# EAGLE board MAAV_Vehicle_13v1 (EAGLE 6.2)
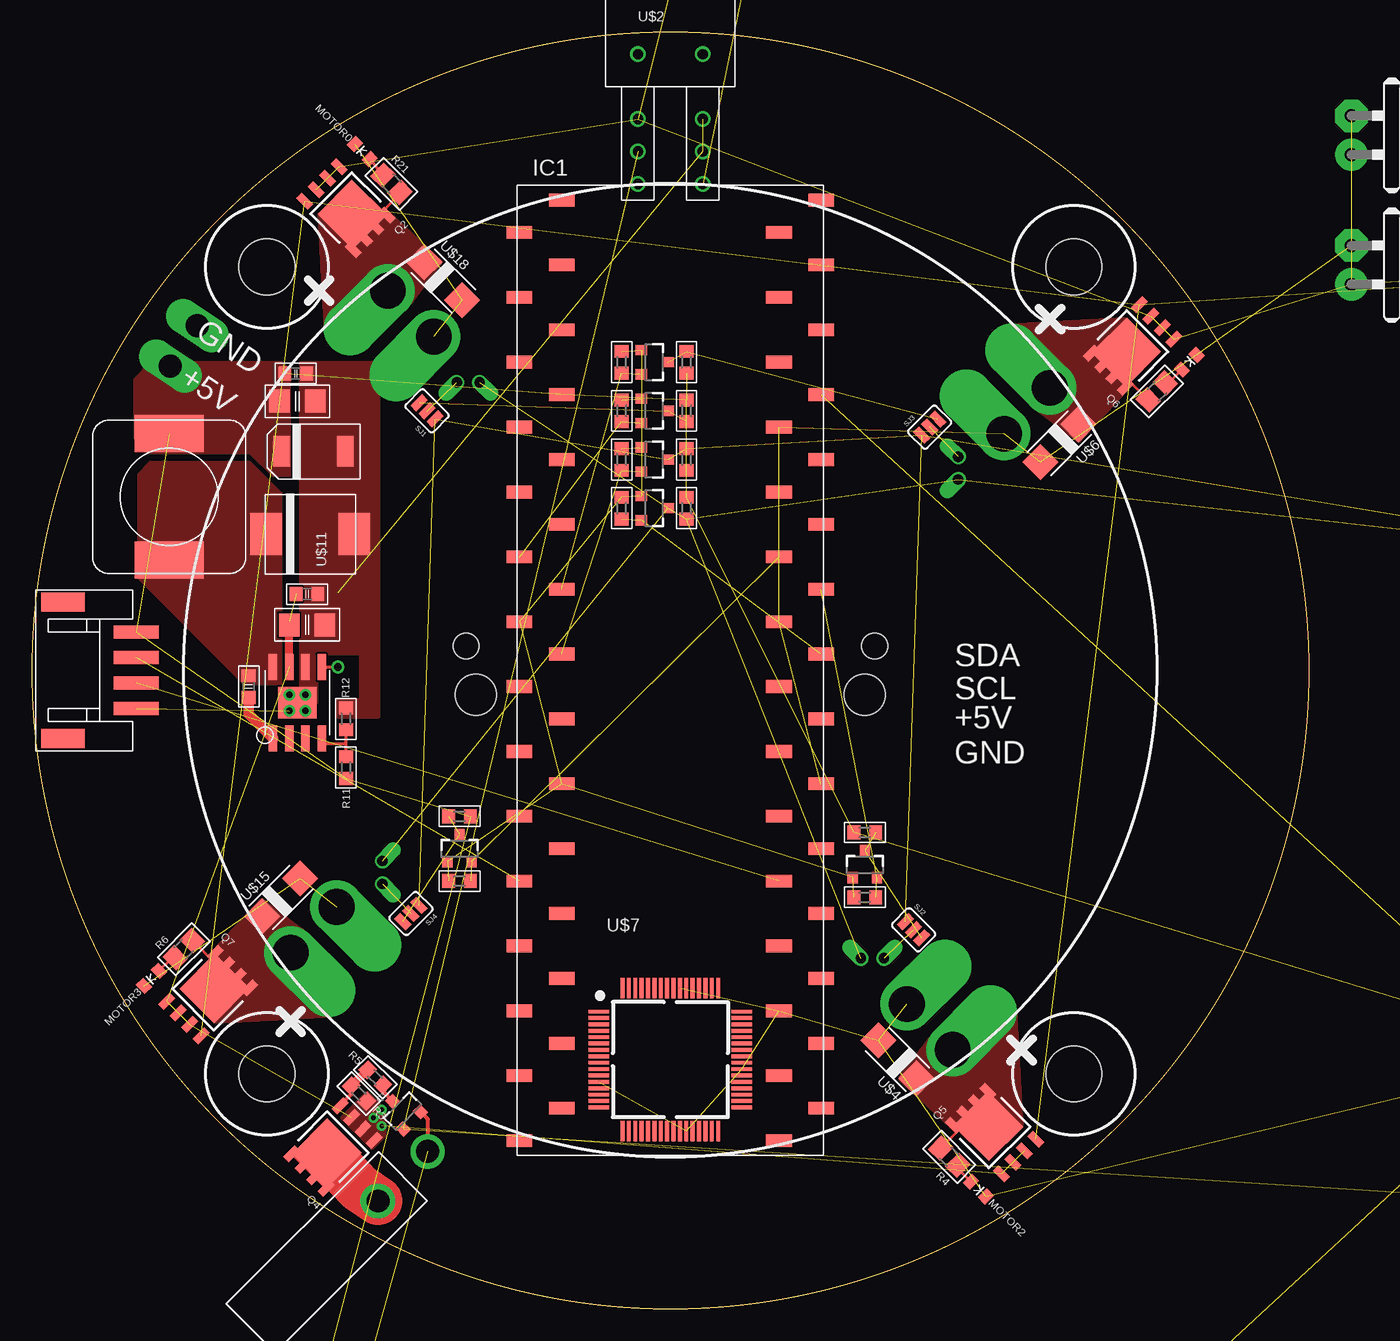
[diagram p0: board, top side]
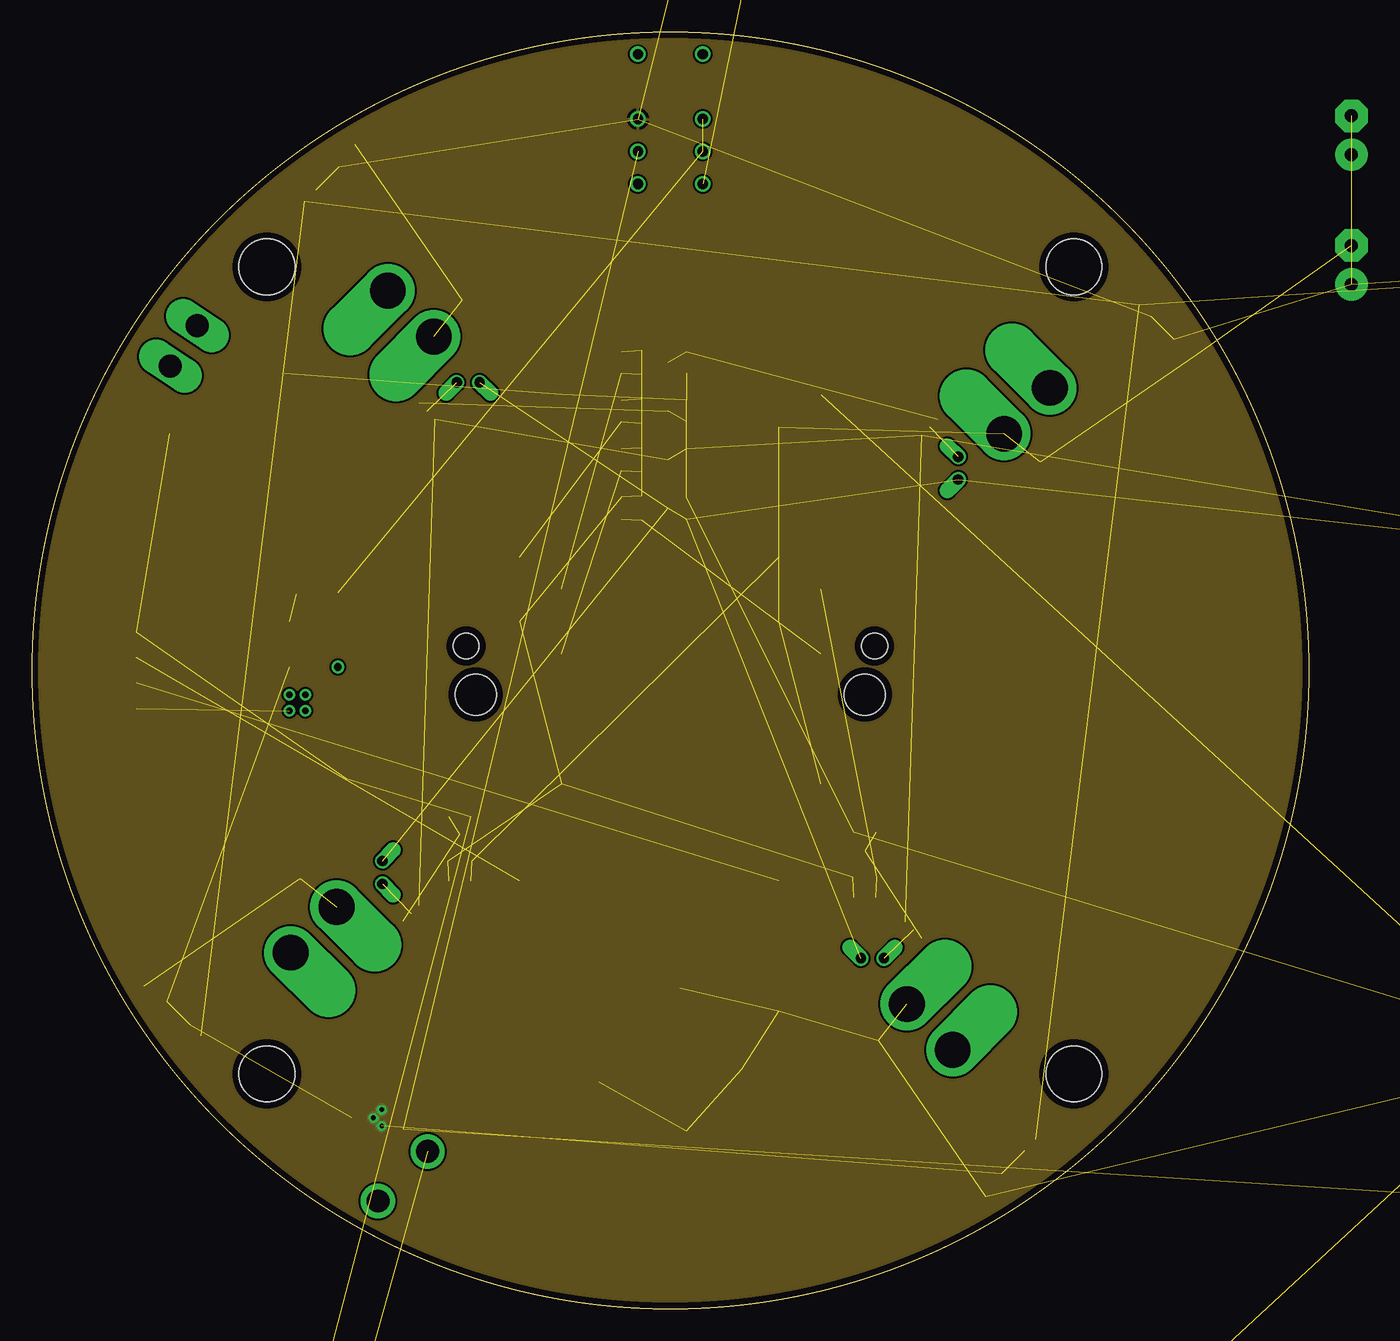
[diagram p1: board, inner layer Route2]
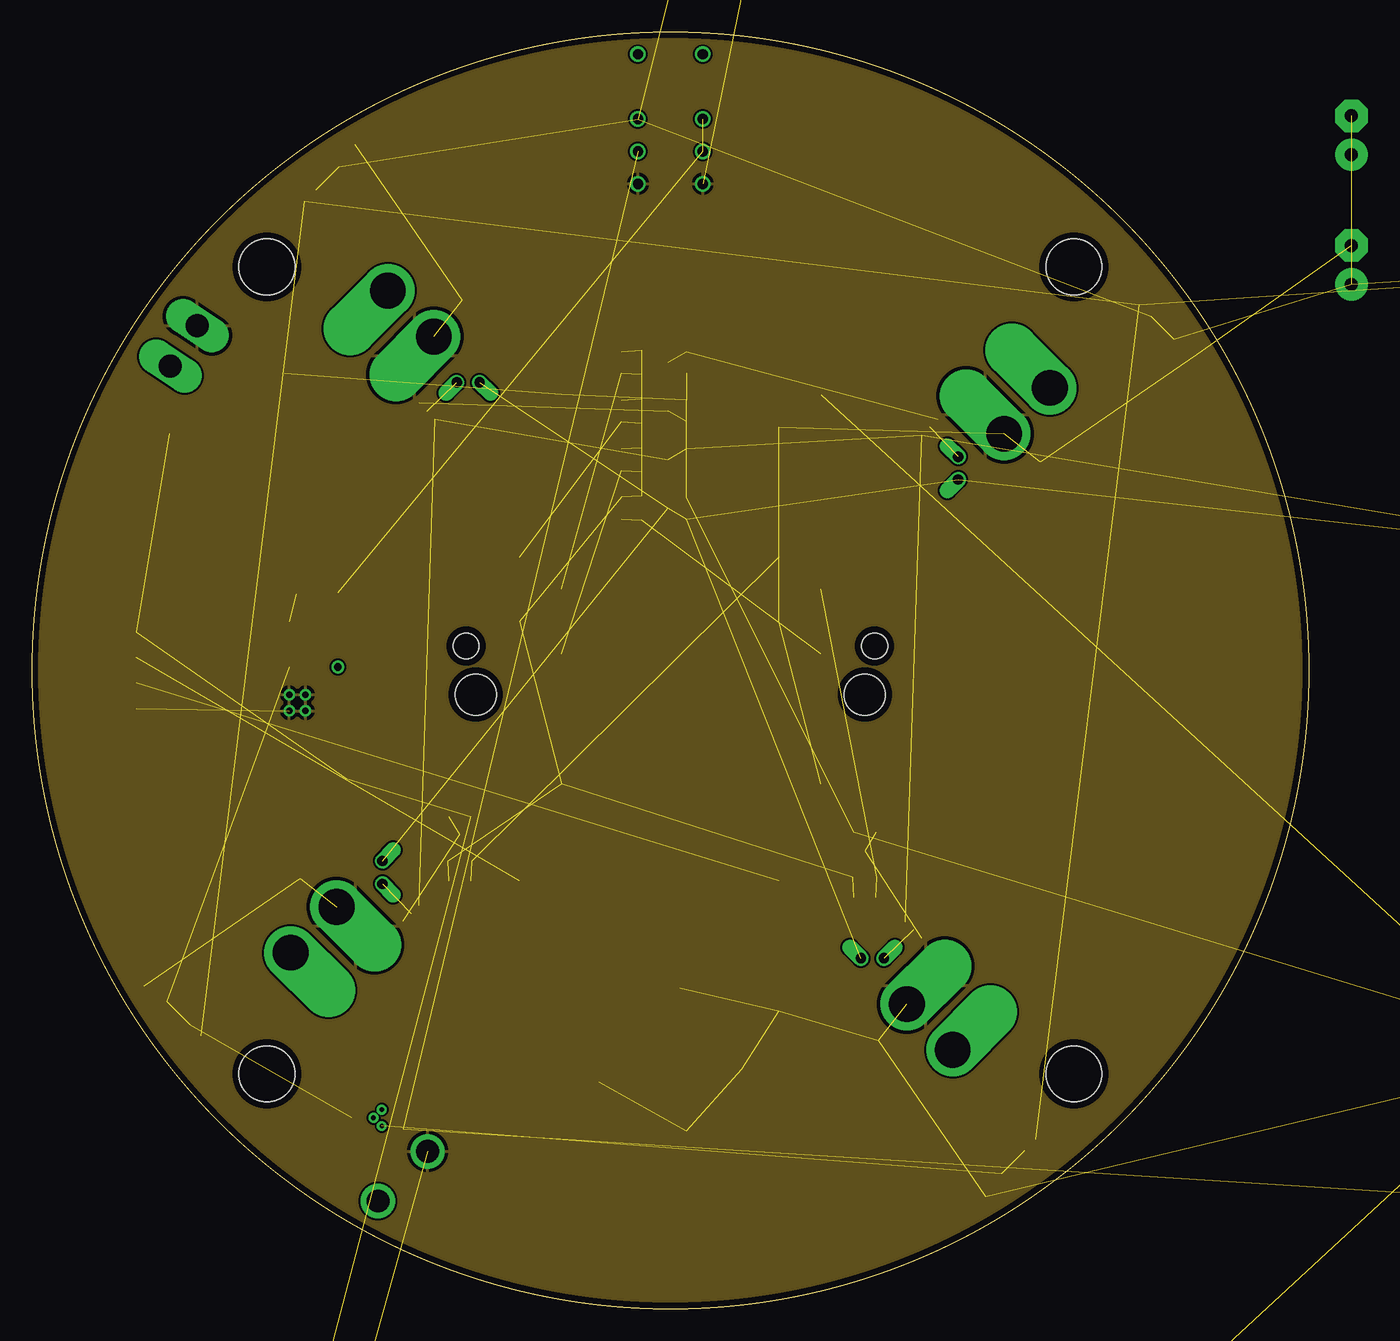
[diagram p2: board, inner layer Route15]
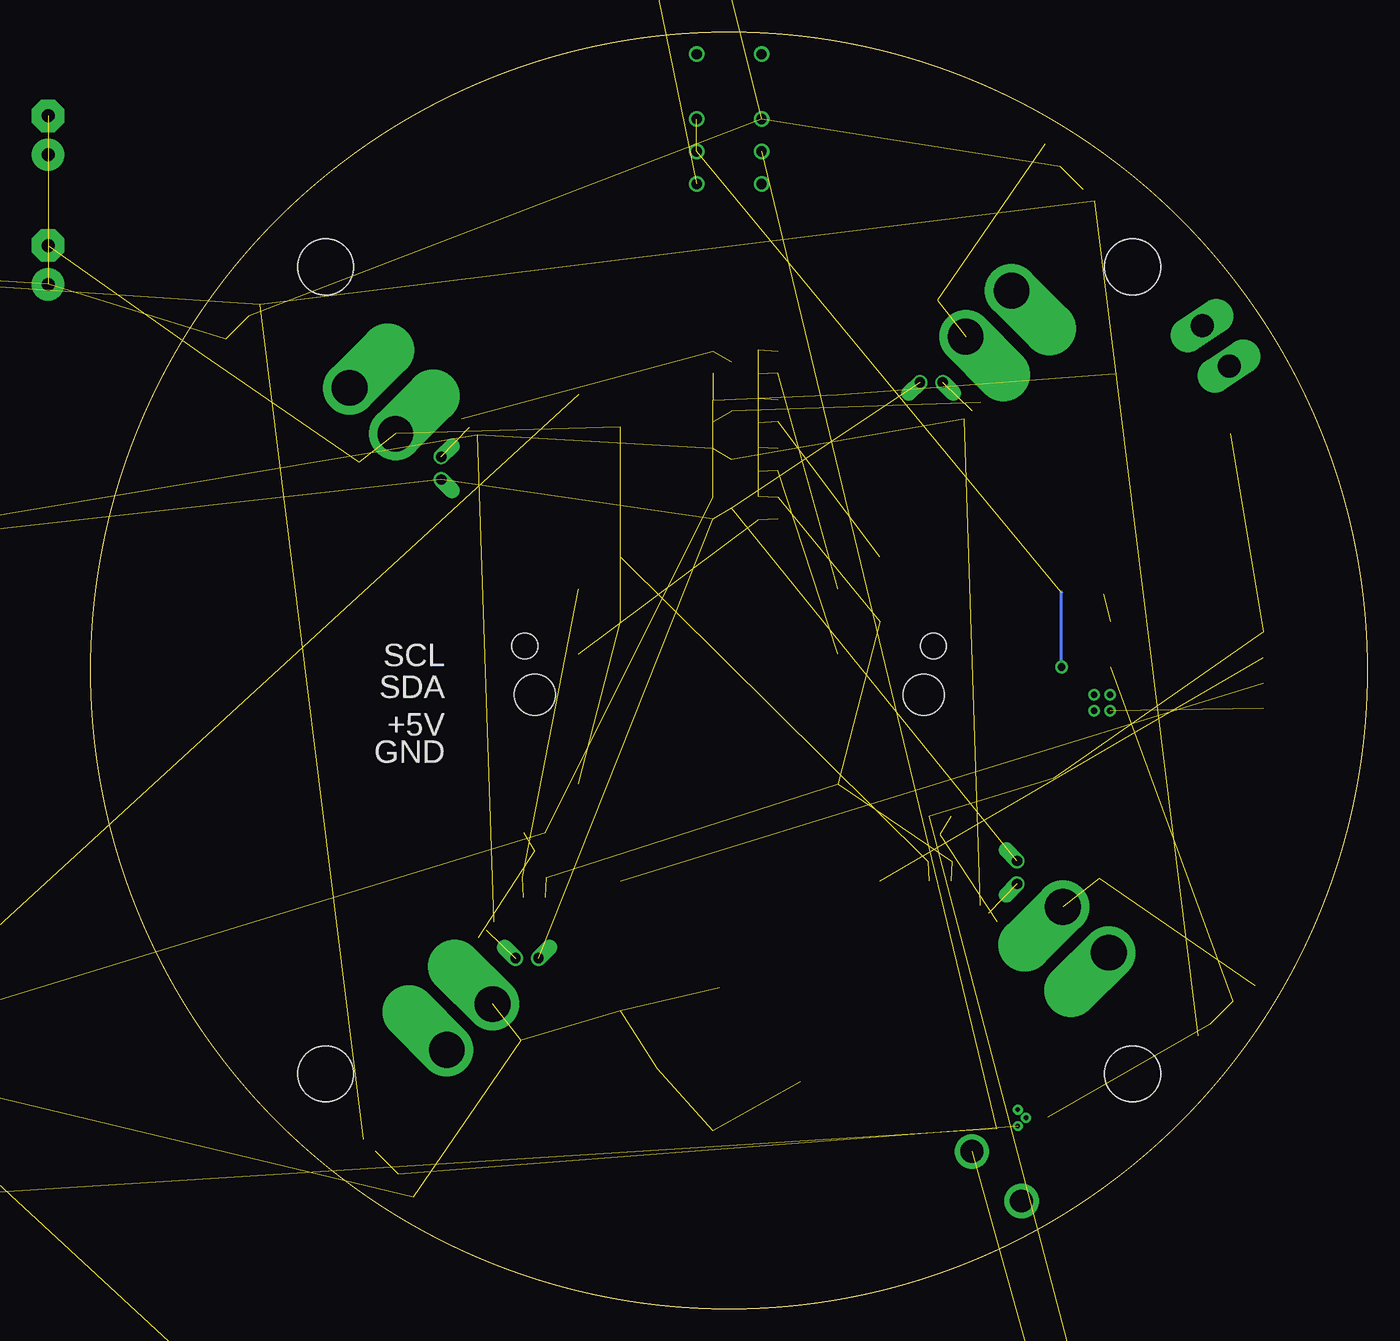
[diagram p3: board, bottom side, seen from below]

Size 100 x 100 mm. Coordinates in mm from the lower left corner, seen from the top.
Outline: circle at 50,50 radius 50
Copper layers (1+2*15+16): Top 0.0178mm / dielectric 12mil / Route2 0.0356mm / dielectric 28mil / Route15 0.0356mm / dielectric 12mil / Bottom 0.0178mm
Design rules: minimum track width 6mil, minimum drill 8mil, track to track 6mil, track to pad 6mil, pad to pad 6mil, via to via 6mil, smd to smd 6mil, copper to edge 20mil, drill to drill 16mil, minimum pad ring 8mil, minimum via ring 8mil, stop-mask expansion 3mil, vias tented up to drill 0mil, thermal gap 10mil
Holes 4.37 mm at 81.6,81.6 81.6,18.4 18.4,18.4 18.4,81.6

## Footprints (pad centres in the part's own frame; a part is rotated, then mirrored left to right if it is on the bottom)
C_2917_POL = smd 1.3 x 2.4: A -2.5,0; C 2.5,0
C0603 = smd 1 x 1.1: 1 -0.85,0; 2 0.85,0
C1206 = smd 1.6 x 1.8: 1 -1.4,0; 2 1.4,0
0805 = smd 0.8 x 1.2: 1 -0.9,0; 2 0.9,0
0603-CAP = smd 1.1 x 1: 1 -0.85,0; 2 0.85,0
EH22-9 = drill 1.016 pad 2.54: + 0,-1.524 | drill 1.016 pad 2.54 octagon: - 0,1.524
PINTO_SMD = smd 2 x 1: P1 8.509,-36.83; P2 -11.811,-36.83; P3 11.811,-34.29; P4 -8.509,-34.29; P5 8.509,-31.75; P6 -11.811,-31.75; P7 11.811,-29.21; P8 -8.509,-29.21; P9 8.509,-26.67; P10 -11.811,-26.67; P11 11.811,-24.13; P12 -8.509,-24.13; P13 8.509,-21.59; P14 -11.811,-21.59; P15 11.811,-19.05; P16 -8.509,-19.05; P17 8.509,-16.51; P18 -11.811,-16.51; P19 11.811,-13.97; P20 -8.509,-13.97; P21 8.509,-11.43; P22 -11.811,-11.43; P23 11.811,-8.89; P24 -8.509,-8.89; P25 8.509,-6.35; P26 -11.811,-6.35; P27 11.811,-3.81; P28 -8.509,-3.81; P29 8.509,-1.27; P30 -11.811,-1.27; P31 11.811,1.27; P32 -8.509,1.27; P33 8.509,3.81; P34 -11.811,3.81; P35 11.811,6.35; P36 -8.509,6.35; P37 8.509,8.89; P38 -11.811,8.89; P39 11.811,11.43; P40 -8.509,11.43; P41 8.509,13.97; P42 -11.811,13.97; P43 11.811,16.51; P44 -8.509,16.51; P45 8.509,19.05; P46 -11.811,19.05; P47 11.811,21.59; P48 -8.509,21.59; P49 8.509,24.13; P50 -11.811,24.13; P51 11.811,26.67; P52 -8.509,26.67; P53 8.509,29.21; P54 -11.811,29.21; P55 11.811,31.75; P56 -8.509,31.75; P57 8.509,34.29; P58 -11.811,34.29; P59 11.811,36.83; P60 -8.509,36.83
IMU = hole 3.226: -15.24,-1.905; 15.24,-1.905 | hole 2.032: -16.002,1.905; 16.002,1.905
MA03-2 = drill 1.016 octagon: P$1 -2.54,-1.46; P$2 0,-1.079; P$3 2.54,-1.46; P$4 2.54,1.079; P$5 0,1.46; P$6 -2.54,1.079
MA-04-SMD = smd 3.5 x 1: 1 2.875,3; 2 2.875,1; 3 2.875,-1; 4 2.875,-3 | smd 3.4 x 1.5: P$1 -2.875,-5.35; P$2 -2.875,5.35
POWER_CONN = drill 1.8: P1 2.75,0; P2 -2.75,0
LED-0603 = smd 0.8 x 0.8: A 0,-0.75; C 0,0.75
CHIPLED_0603 = smd 0.8 x 1: A -0.825,0; C 0.825,0
SOT-23 = smd 0.787 x 0.889: 1 0.025,-1.016; 2 -0.94,1.016; 3 0.991,1.016
CRYSTAL_16MHZ = drill 0.8: P$1 -2.44,0; P$2 2.44,0
SO-8_POWER-PAK = smd 0.61 x 1.27: D1 -1.905,2.67; D2 -0.635,2.67; D3 0.635,2.67; D4 1.905,2.67; G 1.905,-2.67; S1 -1.905,-2.67; S2 -0.635,-2.67; S3 0.635,-2.67 | smd 3.81 x 3.91: D5 0,0.69
SOT23-3 = smd 0.8 x 0.9: 1 -0.95,-1; 2 0.95,-1; 3 0,1.1
R0603 = smd 1 x 1.1: 1 -0.85,0; 2 0.85,0
R0805 = smd 1.3 x 1.5: 1 -0.95,0; 2 0.95,0
0603-RES = smd 1.1 x 1: 1 -0.85,0; 2 0.85,0
SWITCH-OFF-MOM = smd 1.45 x 1: P$1 2.575,0.85; P$2 2.575,-0.85; P$3 -2.575,0.85; P$4 -2.575,-0.85
SJ_3 = smd 0.635 x 1.27: 1 -0.889,0; 2 0,0; 3 0.889,0
MA04-1 = drill 1.016 long: 1 -3.81,0; 2 -1.27,0; 3 1.27,0; 4 3.81,0
TPS5450 = smd 2.032 x 0.66: P$1 -2.794,1.905; P$2 -2.794,0.635; P$3 -2.794,-0.635; P$4 -2.794,-1.905; P$5 2.794,-1.905; P$6 2.794,-0.635; P$7 2.794,0.635; P$8 2.794,1.905 | smd 2.49 x 2.99: P$9 0,0 | drill 0.5: P$10 0.635,0.635; P$11 0.635,-0.635; P$12 -0.635,-0.635; P$13 -0.635,0.635
32-TQFP = smd 1.6 x 0.45: P$1 -4.1,2.8; P$2 -4.1,2; P$3 -4.1,1.2; P$4 -4.1,0.4; P$5 -4.1,-0.4; P$6 -4.1,-1.2; P$7 -4.1,-2; P$8 -4.1,-2.8; P$17 4.1,-2.8; P$18 4.1,-2; P$19 4.1,-1.2; P$20 4.1,-0.4; P$21 4.1,0.4; P$22 4.1,1.2; P$23 4.1,2; P$24 4.1,2.8 | smd 0.45 x 1.6: P$9 -2.8,-4.1; P$10 -2,-4.1; P$11 -1.2,-4.1; P$12 -0.4,-4.1; P$13 0.4,-4.1; P$14 1.2,-4.1; P$15 2,-4.1; P$16 2.8,-4.1; P$25 2.8,4.1; P$26 2,4.1; P$27 1.2,4.1; P$28 0.4,4.1; P$29 -0.4,4.1; P$30 -1.2,4.1; P$31 -2,4.1; P$32 -2.8,4.1
8-SOIC = smd 2 x 0.6: P$1 -2.4,1.905; P$2 -2.4,0.635; P$3 -2.4,-0.635; P$4 -2.4,-1.905; P$5 2.4,-1.905; P$6 2.4,-0.635; P$7 2.4,0.635; P$8 2.4,1.905
CDRH127 = smd 2.9 x 5.4: P1 -4.95,0; P2 4.95,0
SWITCH_VERT_DPDT = drill 0.8: G1 -2.54,2.54; G2 -2.54,-2.54; P$1 7.62,-2.54; P$2 5.08,-2.54; P$3 2.54,-2.54; P$4 7.62,2.54; P$5 5.08,2.54; P$6 2.54,2.54
ESC_CONN = drill 2.8 offset: BATT 2.54,0; GND -2.54,0 | drill 0.8 offset: SCL/C- -7.62,0; SDA/C+ -6.35,1.27
DO-214AC,SMC = smd 2 x 2: A 2.1,0; C -2.1,0
64-PQFP = smd 1.6 x 0.3: P$1 -5.6,3.75; P$2 -5.6,3.25; P$3 -5.6,2.75; P$4 -5.6,2.25; P$5 -5.6,1.75; P$6 -5.6,1.25; P$7 -5.6,0.75; P$8 -5.6,0.25; P$9 -5.6,-0.25; P$10 -5.6,-0.75; P$11 -5.6,-1.25; P$12 -5.6,-1.75; P$13 -5.6,-2.25; P$14 -5.6,-2.75; P$15 -5.6,-3.25; P$16 -5.6,-3.75; P$33 5.6,-3.75; P$34 5.6,-3.25; P$35 5.6,-2.75; P$36 5.6,-2.25; P$37 5.6,-1.75; P$38 5.6,-1.25; P$39 5.6,-0.75; P$40 5.6,-0.25; P$41 5.6,0.25; P$42 5.6,0.75; P$43 5.6,1.25; P$44 5.6,1.75; P$45 5.6,2.25; P$46 5.6,2.75; P$47 5.6,3.25; P$48 5.6,3.75 | smd 0.3 x 1.6: P$17 -3.75,-5.6; P$18 -3.25,-5.6; P$19 -2.75,-5.6; P$20 -2.25,-5.6; P$21 -1.75,-5.6; P$22 -1.25,-5.6; P$23 -0.75,-5.6; P$24 -0.25,-5.6; P$25 0.25,-5.6; P$26 0.75,-5.6; P$27 1.25,-5.6; P$28 1.75,-5.6; P$29 2.25,-5.6; P$30 2.75,-5.6; P$31 3.25,-5.6; P$32 3.75,-5.6; P$49 3.75,5.6; P$50 3.25,5.6; P$51 2.75,5.6; P$52 2.25,5.6; P$53 1.75,5.6; P$54 1.25,5.6; P$55 0.75,5.6; P$56 0.25,5.6; P$57 -0.25,5.6; P$58 -0.75,5.6; P$59 -1.25,5.6; P$60 -1.75,5.6; P$61 -2.25,5.6; P$62 -2.75,5.6; P$63 -3.25,5.6; P$64 -3.75,5.6
LIPO_POWER = drill 2.8 octagon: GND 3.81,0 | drill 2.8: V_BATT -3.81,0
LIPO_POWER_50A = drill 2.8: BATT -3.81,0 | drill 2.8 octagon: GND 3.81,0
H3894-ND = drill 0.8: GND 0,-2.75; POW -2,-2.75; SIG 2,-2.75
DO-214AB,SMC = smd 2.5 x 3.3: A 3.45,0; C -3.45,0
POWER_HOLES = drill 1.8 long: P$1 -1.905,0; P$2 1.905,0

## Placement (x,y rotation side)
C2  [C_2917_POL]  22.06,67.14 0 top
C3  0.01uF  [C0603]  21.55,55.97 0 top
C4  10uF  [C1206]  185.89,-2.07 0 top  (outside the outline)
C5  10uF  [C1206]  21.55,53.56 0 top
C6  0.01uF  [C0603]  16.98,48.73 90 top
C7  10uF  [C1206]  20.79,71.08 0 top
C8  10uF  [0805]  289.39,-69.3 90 top  (outside the outline)
C9  10uF  [0603-CAP]  281.77,-71.28 90 top  (outside the outline)
C10  100nF  [0603-CAP]  176.54,81.75 90 top  (outside the outline)
C11  100nF  [0603-CAP]  189.7,80.48 36.2 top  (outside the outline)
C12  100nF  [0603-CAP]  171.92,72.86 270 top  (outside the outline)
C13  100nF  [0603-CAP]  174.46,81.75 90 top  (outside the outline)
C14  22pF  [0603-CAP]  192.24,68.41 90 top  (outside the outline)
C15  22pF  [0603-CAP]  192.24,65.24 270 top  (outside the outline)
C16  0.01uF  [C0603]  20.66,73.24 0 top
C17  0.1uF  [C0603]  123.66,23.33 0 top  (outside the outline)
C18  10uF  [C1206]  121.12,19.52 0 top  (outside the outline)
C25  10uF  [C1206]  62.7,138.9 270 top  (outside the outline)
C28  680uF  [EH22-9]  103.34,91.91 0 top  (outside the outline)
C29  680uF  [EH22-9]  103.34,81.75 0 top  (outside the outline)
IC1  PINTO_SMD  [PINTO_SMD]  50,50 0 top
IMU_LAYOUT  IMU  [IMU]  50,50 0 bottom
J1  MA03-2  [MA03-2]  190.97,75.4 300 top  (outside the outline)
J7  MA04-1  [MA-04-SMD]  5.3,50 0 top
LASER_POWER  POWER_CONN  [POWER_CONN]  29.05,10.38 225 top
LED1  GREEN  [LED-0603]  176.6,92.92 330 top  (outside the outline)
LED2  GREEN  [LED-0603]  174.84,93.94 330 top  (outside the outline)
LED3  GREEN  [LED-0603]  173.08,94.96 330 top  (outside the outline)
MOTOR0  GREEN  [CHIPLED_0603]  25.87,90.64 135 top
MOTOR1  GREEN  [CHIPLED_0603]  90.64,74.13 45 top
MOTOR2  GREEN  [CHIPLED_0603]  74.13,9.36 315 top
MOTOR3  GREEN  [CHIPLED_0603]  9.36,25.87 225 top
MR1  [SOT-23]  171.92,81.75 180 top  (outside the outline)
Q1  CRYSTAL_16MHZ  [CRYSTAL_16MHZ]  188.43,66.51 90 top  (outside the outline)
Q2  [SO-8_POWER-PAK]  24.6,86.19 225 top
Q3  MOSFET-NCHANNELSMD  [SOT23-3]  29.05,15.46 45 top
Q4  [SO-8_POWER-PAK]  23.58,12.66 135 top
Q5  [SO-8_POWER-PAK]  75.4,13.8 45 top
Q6  [SO-8_POWER-PAK]  86.19,75.4 135 top
Q7  [SO-8_POWER-PAK]  13.8,24.6 315 top
R1  10k  [R0603]  46.19,62.7 90 top
R2  10k  [R0603]  51.27,62.7 90 top
R3  1k  [R0603]  25.62,16.85 315 top
R4  750  [R0805]  71.84,11.9 135 top
R5  1k  [R0603]  26.89,18.12 135 top
R6  750  [R0805]  11.9,28.16 45 top
R7  10k  [0603-RES]  194.78,70.32 0 top  (outside the outline)
R8  10k  [0805]  168.11,84.29 180 top  (outside the outline)
R9  10k  [R0603]  46.19,66.51 90 top
R10  10k  [R0603]  51.27,66.51 270 top
R11  10k  [R0603]  24.6,42.38 270 top
R12  3.16k  [R0603]  24.6,46.19 90 top
R13  10k  [R0603]  46.19,70.32 90 top
R14  4.7k  [R0603]  51.27,70.32 90 top
R15  10k  [R0603]  46.19,74.13 90 top
R16  4.7k  [R0603]  51.27,74.13 270 top
R17  10k  [R0603]  65.24,32.22 180 top
R18  4.7k  [R0603]  65.24,37.3 180 top
R19  10k  [R0603]  33.49,33.49 180 top
R20  4.7k  [R0603]  33.49,38.57 0 top
R21  750  [R0805]  28.16,88.1 315 top
R22  10k  [R0603]  123.66,15.71 0 top  (outside the outline)
R23  10k  [0805]  171.92,84.29 180 top  (outside the outline)
R24  750  [R0805]  88.1,71.84 225 top
R25  432  [R0603]  123.66,13.17 0 top  (outside the outline)
R26  10k  [R0603]  122.39,8.09 0 top  (outside the outline)
R27  432  [R0603]  122.39,10.63 0 top  (outside the outline)
R44  240  [0603-RES]  174.7,89.62 240 top  (outside the outline)
R47  240  [0603-RES]  172.94,90.64 240 top  (outside the outline)
R48  240  [0603-RES]  171.18,91.66 240 top  (outside the outline)
S2  SWITCH-OFF-MOM  [SWITCH-OFF-MOM]  194.78,65.24 90 top  (outside the outline)
SJ1  [SJ_3]  30.95,70.32 135 top
SJ2  [SJ_3]  69.05,29.68 315 top
SJ3  [SJ_3]  70.32,69.05 45 top
SJ4  [SJ_3]  29.68,30.95 225 top
SV1  [MA04-1]  171.92,50 90 top  (outside the outline)
T3  MOSFET-NCHANNELSMD  [SOT23-3]  48.73,62.7 270 top
T4  MOSFET-NCHANNELSMD  [SOT23-3]  48.73,66.51 270 top
T7  MOSFET-NCHANNELSMD  [SOT23-3]  48.73,70.32 270 top
T8  MOSFET-NCHANNELSMD  [SOT23-3]  48.73,74.13 270 top
T9  MOSFET-NCHANNELSMD  [SOT23-3]  65.24,34.76 0 top
T10  MOSFET-NCHANNELSMD  [SOT23-3]  33.49,36.03 0 top
T11  [SOT-23]  168.11,81.75 180 top  (outside the outline)
U2  TPS5450  [TPS5450]  20.79,47.46 90 top
U3  ATMEGA328-AU  [32-TQFP]  179.54,72.86 180 top  (outside the outline)
U4  REG_3V_8SOIC  [8-SOIC]  285.59,-71.28 270 top  (outside the outline)
U$1  INDUCTOR  [CDRH127]  10.76,63.59 90 top
U$2  SWITCH_DPDT  [SWITCH_VERT_DPDT]  50,95.72 270 top
U$3  ESC_CONN  [ESC_CONN]  70.32,22.06 315 top
U$4  DIODE-SCHOTTKY  [DO-214AC,SMC]  67.78,19.52 135 top
U$5  ESC_CONN  [ESC_CONN]  77.94,70.32 45 top
U$6  DIODE-SCHOTTKY  [DO-214AC,SMC]  80.48,67.78 225 top
U$7  TM4C123GH6PM  [64-PQFP]  50,19.52 0 top
U$8  LIPO_POWER  [LIPO_POWER]  65.24,108.42 0 top  (outside the outline)
U$9  BATTERY50A  [LIPO_POWER_50A]  62.7,138.9 0 top  (outside the outline)
U$10  H3894-ND  [H3894-ND]  234.15,11.9 238.9 top  (outside the outline)
U$11  DIODE-SCHOTTKYBIG  [DO-214AB,SMC]  21.81,60.67 0 top
U$12  POWER_HOLES  [POWER_HOLES]  11.9,75.4 56.3 top
U$13  ESC_CONN  [ESC_CONN]  29.68,77.94 135 top
U$14  ESC_CONN  [ESC_CONN]  22.06,29.68 225 top
U$15  DIODE-SCHOTTKY  [DO-214AC,SMC]  19.52,32.22 45 top
U$16  H3894-ND  [H3894-ND]  230.34,32.22 270 top  (outside the outline)
U$17  H3894-ND  [H3894-ND]  4.28,-80.81 0 top  (outside the outline)
U$18  DIODE-SCHOTTKY  [DO-214AC,SMC]  32.22,80.48 315 top

## Library data of the parts
C2 = Jon_LIB; DIGIKEY: 478-1811-1-ND
C3 C6 = Jon_LIB; DIGIKEY#: 490-1512-1-ND
C4 IC1 SJ1-SJ4 U$3 U$5 U$7 U$9 U$11 U$13 U$14 = Jon_LIB
C5 C25 = Jon_LIB; DIGIKEY: 445-4043-1-ND
C7 = Jon_LIB; DIGIKEY: 445-1597-1-ND
C8 = SparkFun; DIGIKEY: 490-1746-1-ND
C9 = SparkFun; DIGIKEY: 445-4112-1-ND
C10-C13 = SparkFun; DIGIKEY: 478-1239-1-ND
C14 C15 = SparkFun; DIGIKEY: 478-6200-1-ND
C16 = Jon_LIB; DIGIKEY: 478-1601-1-ND
C17 = Jon_LIB; DIGIKEY#: 478-1239-1-ND
C18 = Jon_LIB; DIGIKEY#: 445-4043-1-ND
C28 C29 = MAAV; DIGIKEY: P12378-ND
IMU_LAYOUT J1 U$8 U$12 = MAAV
J7 = Jon_LIB; DIGIKEY#: 455-1751-1-ND
LASER_POWER = MAAV; DIGIKEY: A30614-ND
LED1-LED3 = SparkFun; DIGIKEY: 1080-1405-1-ND
MOTOR0 MOTOR1-MOTOR3 = Jon_LIB; DIGIKEY: 1080-1405-1-ND
MR1 = zetex; DIGIKEY: FDV304PCT-ND; OC_FARNELL: unknown; OC_NEWARK: unknown
Q1 = MAAV; DIGIKEY: 300-8499-ND
Q2 Q4-Q7 = Jon_LIB; DIGIKEY#: SI7135DP-T1-GE3CT-ND
Q3 = Jon_LIB; DIGIKEY#: BSS13KCT-ND
R1 R2 R9 R10 R13 R15 R17 R19 = Jon_LIB; DIGIKEY#: P10KGCT-ND
R3 R5 = Jon_LIB; DIGIKEY#: P1.0KGCT-ND
R4 R6 R21 R24 = Jon_LIB; DIGIKEY: P750ADCT-ND
R7 = SparkFun; DIGIKEY: P10KGCT-ND
R8 R23 = SparkFun; DIGIKEY: P10KACT-ND
R11 = Jon_LIB; DIGIKEY#: P10KBCT-ND
R12 = Jon_LIB; DIGIKEY#: 311-3.16KDCT-ND
R14 R16 R18 R20 = Jon_LIB; DIGIKEY#: P4.7KGCT-ND
R22 R26 = Jon_LIB; DIGIKEY#: P10KDBCT-ND
R25 R27 = Jon_LIB; DIGIKEY#: P432DBCT-ND
R44 R47 R48 = SparkFun; DIGIKEY: P240GCT-ND
S2 = p498; DIGIKEY: P11084SCT-ND
SV1 = con-lstb; OC_FARNELL: unknown; OC_NEWARK: unknown
T3 T4 T7-T10 = Jon_LIB; DIGIKEY: BSS138KCT-ND
T11 = zetex; DIGIKEY: BSS138KCT-ND; OC_FARNELL: unknown; OC_NEWARK: unknown
U2 = MAAV; DIGIKEY: 296-23750-1-ND
U3 = MAAV; DIGIKEY: ATMEGA328-AU-ND
U4 = MAAV; DIGIKEY: 296-2719-5-ND
U$1 = Jon_LIB; DIGIKEY: 308-1333-1-ND
U$2 = Jon_LIB; DIGIKEY#: AS22AV-ND
U$4 U$6 U$15 U$18 = Jon_LIB; DIGIKEY#: RB080L-30TE25CT-ND
U$10 U$16 U$17 = MAAV; DIGIKEY: H3894-ND

## Nets
+1V8: IC1.P24 IC1.P34 R1.2 R9.2 R13.2 R15.2 R17.2 R19.2 T3.1 T4.1 T7.1 T8.1 T9.1 T10.1
+5V: C2.A C7.1 C9.1 C10.1 C11.1 C13.1 C16.1 C17.2 C18.2 IC1.P48 J1.P$6 J7.1 R2.2 R7.2 R10.2 R11.2 R14.2 R16.2 R18.2 R20.2 SV1.2 U3.P$4 U3.P$6 U3.P$18 U4.P$5 U4.P$6 U$1.P2 U$10.POW U$12.P$1 U$16.POW U$17.POW
+12V: C3.1 C4.1 C5.1 C25.1 C28.+ C29.+ Q2.S1 Q2.S2 Q2.S3 Q4.S1 Q4.S2 Q4.S3 Q5.S1 Q5.S2 Q5.S3 Q6.S1 Q6.S2 Q6.S3 Q7.S1 Q7.S2 Q7.S3 R3.2 R8.2 U2.P$7 U$2.P$3 U$9.BATT
-3V3: C8.1 U4.P$7 U4.P$8
BATT_SENSE: R26.1 R27.2 U3.P$19
ENABLE: MR1.2 Q3.1 R22.2 R26.2 U$2.P$2
GND: C2.C C3.2 C4.2 C5.2 C7.2 C8.2 C9.2 C10.2 C11.2 C12.2 C13.2 C14.1 C15.1 C16.2 C17.1 C18.1 C25.2 C28.- C29.- IC1.P9 IC1.P23 IC1.P33 IC1.P45 J1.P$4 J7.4 LASER_POWER.P2 LED1.C LED2.C LED3.C MOTOR0.C MOTOR1.C MOTOR2.C MOTOR3.C Q3.2 R12.2 R23.1 R25.1 R27.1 S2.P$2 S2.P$4 SV1.1 T11.2 U2.P$6 U2.P$9 U2.P$10 U2.P$11 U2.P$12 U2.P$13 U3.P$3 U3.P$5 U3.P$21 U4.P$3 U4.P$4 U$2.P$1 U$2.P$4 U$3.GND U$4.A U$5.GND U$6.A U$7.P$12 U$7.P$27 U$7.P$39 U$7.P$55 U$9.GND U$10.GND U$11.A U$12.P$2 U$13.GND U$14.GND U$15.A U$16.GND U$17.GND U$18.A
INT0: U3.P$32
KILL_SIG: U3.P$12 U$17.SIG
LED1: R48.2 U3.P$13
LED2: R47.2 U3.P$26
LED3: R44.2 U3.P$2
M0_POWER: Q2.D1 Q2.D2 Q2.D3 Q2.D4 Q2.D5 R21.2 U$13.BATT U$18.C
M1_POWER: Q6.D1 Q6.D2 Q6.D3 Q6.D4 Q6.D5 R24.2 U$5.BATT U$6.C
M2_POWER: Q5.D1 Q5.D2 Q5.D3 Q5.D4 Q5.D5 R4.2 U$3.BATT U$4.C
M3_POWER: Q7.D1 Q7.D2 Q7.D3 Q7.D4 Q7.D5 R6.2 U$14.BATT U$15.C
MISO: J1.P$1 U3.P$16
MOSI: J1.P$5 U3.P$15
MOTOR0_PWM_1V8: IC1.P38 R13.1 T7.2
MOTOR0_PWM_5V: R14.1 SJ1.3 T7.3
MOTOR1_PWM_1V8: IC1.P36 R15.1 T8.2
MOTOR1_PWM_5V: R16.1 SJ3.3 T8.3
MOTOR2_PWM_1V8: IC1.P35 R17.1 T9.2
MOTOR2_PWM_5V: R18.1 SJ2.3 T9.3
MOTOR3_PWM_1V8: IC1.P37 R19.1 T10.2
MOTOR3_PWM_5V: R20.1 SJ4.3 T10.3
MOTOR_ENABLE: MR1.1 Q2.G Q5.G Q6.G Q7.G R23.2
MOTOR_LOGIC: T11.3 U3.P$11
N$1: Q4.G R3.1 R5.2
N$2: LED1.A R44.1
N$3: C12.1 U3.P$20
N$4: R11.1 R12.1 U2.P$4
N$5: MR1.3 R8.1 T11.1
N$6: C14.2 Q1.P$2 U3.P$8
N$8: C15.2 Q1.P$1 U3.P$7
N$9: C6.1 U2.P$1
N$10: Q3.3 R5.1
N$11: U2.P$5 U$2.P$5 U$2.P$6
N$12: MOTOR1.A R24.1
N$13: SJ1.2 U$13.SDA/C+
N$14: MOTOR2.A R4.1
N$15: MOTOR3.A R6.1
N$16: SJ2.2 U$3.SDA/C+
N$17: SJ3.2 U$5.SDA/C+
N$18: SJ4.2 U$14.SDA/C+
N$19: MOTOR0.A R21.1
N$28: C6.2 U2.P$8 U$1.P1 U$11.C
N$33: LED2.A R47.1
N$34: LED3.A R48.1
N$37: LASER_POWER.P1 Q4.D1 Q4.D2 Q4.D3 Q4.D4 Q4.D5
N$38: IC1.P47 R22.1 R25.2
OPT0_SIG: U3.P$23 U$16.SIG
OPT1_SIG: U3.P$1 U$10.SIG
RESET: J1.P$3 R7.1 S2.P$1 S2.P$3 U3.P$29
RXD1: IC1.P17 J7.3
SCK: J1.P$2 U3.P$17
SCL_1V8: IC1.P31 R1.1 T3.2
SCL_5V: R2.1 SV1.4 T3.3 U3.P$28 U$3.SCL/C- U$5.SCL/C- U$13.SCL/C- U$14.SCL/C-
SDA_1V8: IC1.P32 R9.1 T4.2
SDA_5V: R10.1 SJ1.1 SJ2.1 SJ3.1 SJ4.1 SV1.3 T4.3 U3.P$27
TXD1: IC1.P18 J7.2
VBAT: U$7.P$37
VDDA: U$7.P$2

## Tracks (layer width: path | path; a pad name or v marks a point on that pad's centre or on a via)
+1V8  (13 unrouted)
+5V  (24 unrouted)
  pour Top (no thermals): 281.14,-71.92 281.14,-72.56 283.04,-74.46 284.95,-74.46 284.95,-72.56 283.68,-71.28 281.77,-71.28
  pour Top (rank 5, no thermals): 20.16,65.24 18.89,65.24 17.11,67.02 9.23,67.02 8.09,68.16 8.09,72.86 9.36,74.13 19.52,74.13 20.16,73.5
+12V  (via drill 0.36)  (20 unrouted)
  Top 0.61: U2.P$7 20.16,53.81 C5.1
  other vias: 27.39,14.31 26.76,14.95 27.39,15.58
  pour Route2 (rank 4): 29.68,100.8 -0.8,72.86 -0.8,28.41 29.68,-0.8 71.59,-0.8 100.8,28.41 100.8,71.59 71.59,100.8
  pour Top (no thermals): 26.25,16.98 24.22,14.95 26.63,12.53 27.65,13.55 27.65,14.82 27.65,15.58
-3V3
  pour Top (no thermals): 288.12,-74.46 286.22,-74.46 286.22,-72.56 287.49,-71.28 288.94,-69.91 289.88,-69.94 289.88,-72.86
BATT_SENSE  (2 unrouted)
ENABLE  (4 unrouted)
GND  (49 unrouted)
  Top 0.305: Q3.2 30.99,14.85 LASER_POWER.P2
  pour Route15 (rank 5): -0.8,72.86 29.68,100.8 71.59,100.8 100.8,71.59 100.8,28.41 71.59,-0.8 29.68,-0.8 -0.8,28.41
  pour Top (no thermals): 281.44,-70.8 284.65,-70.8 285.1,-70.35 285.1,-68.67 284.65,-68.21 282.21,-68.21 281.44,-68.97
  pour Top (rank 6, no thermals): 21.04,47.46 21.04,74.13 27.14,74.13 27.14,46.32 23.96,46.32 23.96,47.71 25.74,47.71 25.74,51.27 22.31,51.27 22.31,47.46
KILL_SIG  (1 unrouted)
LED1  (1 unrouted)
LED2  (1 unrouted)
LED3  (1 unrouted)
M0_POWER
  Top 0.254: R21.2 27.14,85.56
  pour Top (no thermals): 29.68,78.83 32.09,82 28.03,85.81 22.44,85.69 22.95,76.54
M1_POWER
  Top 0.254: R24.2 85.71,72.89 Q6.D5
  pour Top (no thermals): 78.83,70.32 82,67.91 85.81,71.97 85.69,77.56 76.54,77.05
M2_POWER
  Top 0.254: R4.2 74.13,15.53 74.13,15.71
  pour Top (no thermals): 70.32,21.17 67.91,18 71.97,14.19 77.56,14.31 77.05,23.46
M3_POWER
  Top 0.254: R6.2 14.29,27.11 Q7.D5
  pour Top (no thermals): 21.17,29.68 18,32.09 14.19,28.03 14.31,22.44 23.46,22.95
MISO  (1 unrouted)
MOSI  (1 unrouted)
MOTOR0_PWM_1V8  (2 unrouted)
MOTOR0_PWM_5V  (2 unrouted)
MOTOR1_PWM_1V8  (2 unrouted)
MOTOR1_PWM_5V  (2 unrouted)
MOTOR2_PWM_1V8  (2 unrouted)
MOTOR2_PWM_5V  (2 unrouted)
MOTOR3_PWM_1V8  (2 unrouted)
MOTOR3_PWM_5V  (2 unrouted)
MOTOR_ENABLE  (5 unrouted)
MOTOR_LOGIC  (1 unrouted)
N$1
  Top 0.305: Q4.G 25.02,16.79 R3.1
  Top 0.61: R3.1 R5.2
N$2  (1 unrouted)
N$3  (1 unrouted)
N$4
  Top 0.254: R11.1 24.6,44.28 | 24.6,44.28 R12.1 | U2.P$4 22.7,44.28 24.6,44.28
N$5  (2 unrouted)
N$6  (2 unrouted)
N$8  (2 unrouted)
N$9
  Top 0.813: C6.1 16.98,46.57 U2.P$1
N$10
  Top 0.305: R5.1 27.49,17.01 Q3.3
N$11  (via drill 0.6)  (2 unrouted)
  Top 0.254: U2.P$5 v23.96,50.25
  Bottom 0.254: v23.96,50.25 23.96,56.1
N$12
  Top 0.254: MOTOR1.A 89.03,72.52 R24.1
N$13  (1 unrouted)
N$14
  Top 0.254: MOTOR2.A 72.52,10.97 R4.1
N$15
  Top 0.254: MOTOR3.A 10.97,27.48 R6.1
N$16  (1 unrouted)
N$17  (1 unrouted)
N$18  (1 unrouted)
N$19
  Top 0.254: R21.1 MOTOR0.A
N$28
  pour Top (rank 4, no thermals): 19.52,48.98 19.52,63.84 17.11,66.26 9.23,66.26 8.34,65.37 8.34,57.24 16.6,48.98
N$33  (1 unrouted)
N$34  (1 unrouted)
N$37
  Top 0.254: Q4.D4 Q4.D3 Q4.D2 | Q4.D2 Q4.D1 | Q4.D5 Q4.D2
  Top 3.81: LASER_POWER.P1 25.62,9.49 Q4.D5
N$38  (2 unrouted)
OPT0_SIG  (1 unrouted)
OPT1_SIG  (1 unrouted)
RESET  (4 unrouted)
RXD1  (1 unrouted)
SCK  (1 unrouted)
SCL_1V8  (2 unrouted)
SCL_5V  (7 unrouted)
SDA_1V8  (2 unrouted)
SDA_5V  (7 unrouted)
TXD1  (1 unrouted)

## Text on the board
tPlace: P-FET
tNames: GND | +5V | SDA | SCL | +5V | GND
bNames: SCL | SDA | +5V | GND